# EAGLE board CT_schematic (EAGLE 7.6.0)

Size 100 x 80 mm. Coordinates in mm from the lower left corner, seen from the top.
Outline: 0,0 100,0 100,80 0,80 0,0
Copper layers (1*16): Top 0.035mm / dielectric 1.5mm / Bottom 0.035mm
Design rules "default": minimum track width 10mil, minimum drill 24mil, track to track 8mil, track to pad 8mil, pad to pad 8mil, via to via 8mil, smd to smd 8mil, copper to edge 40mil, drill to drill 8mil, minimum pad ring 10mil, minimum via ring 8mil, stop-mask expansion 4mil, vias tented up to drill 0mil, thermal gap 10mil

## Footprints (pad centres in the part's own frame; a part is rotated, then mirrored left to right if it is on the bottom)
C0603 = smd 0.8 x 0.8: 1 -0.762,0; 2 0.762,0
C0402 = smd 0.5 x 0.5: 1 -0.508,0; 2 0.508,0
C0805 = smd 1.2 x 1.3: 1 -1.016,0; 2 1.016,0
C1210 = smd 1.2 x 2.5: 1 -1.524,0; 2 1.524,0
C1206 = smd 1.3 x 1.6: 1 -1.524,0; 2 1.524,0
EXV-9H = smd 3.505 x 1.676: 1 -2.857,0; 2 2.857,0
L0603 = smd 0.8 x 0.8: 1 -0.762,0; 2 0.762,0
DR1040 = smd 1.6 x 3.2: 1 -4.458,0; 2 4.458,0
PJ-037B_PACKAGE = drill 3.7 square: 1 12,0 | drill 3.2 square: 2 6,0
R0603 = smd 0.8 x 0.8: 1 -0.762,0; 2 0.762,0
UFBGA176_25 = smd 0.3 x 0.3: A1 -4.55,4.55; A2 -3.9,4.55; A3 -3.25,4.55; A4 -2.6,4.55; A5 -1.95,4.55; A6 -1.3,4.55; A7 -0.65,4.55; A8 0,4.55; A9 0.65,4.55; A10 1.3,4.55; A11 1.95,4.55; A12 2.6,4.55; A13 3.25,4.55; A14 3.9,4.55; A15 4.55,4.55; B1 -4.55,3.9; B2 -3.9,3.9; B3 -3.25,3.9; B4 -2.6,3.9; B5 -1.95,3.9; B6 -1.3,3.9; B7 -0.65,3.9; B8 0,3.9; B9 0.65,3.9; B10 1.3,3.9; B11 1.95,3.9; B12 2.6,3.9; B13 3.25,3.9; B14 3.9,3.9; B15 4.55,3.9; C1 -4.55,3.25; C2 -3.9,3.25; C3 -3.25,3.25; C4 -2.6,3.25; C5 -1.95,3.25; C6 -1.3,3.25; C7 -0.65,3.25; C8 0,3.25; C9 0.65,3.25; C10 1.3,3.25; C11 1.95,3.25; C12 2.6,3.25; C13 3.25,3.25; C14 3.9,3.25; C15 4.55,3.25; D1 -4.55,2.6; D2 -3.9,2.6; D3 -3.25,2.6; D4 -2.6,2.6; D5 -1.95,2.6; D6 -1.3,2.6; D7 -0.65,2.6; D8 0,2.6; D9 0.65,2.6; D10 1.3,2.6; D11 1.95,2.6; D12 2.6,2.6; D13 3.25,2.6; D14 3.9,2.6; D15 4.55,2.6; E1 -4.55,1.95; E2 -3.9,1.95; E3 -3.25,1.95; E4 -2.6,1.95; E12 2.6,1.95; E13 3.25,1.95; E14 3.9,1.95; E15 4.55,1.95; F1 -4.55,1.3; F2 -3.9,1.3; F3 -3.25,1.3; F4 -2.6,1.3; F6 -1.3,1.3; F7 -0.65,1.3; F8 0,1.3; F9 0.65,1.3; F10 1.3,1.3; F12 2.6,1.3; F13 3.25,1.3; F14 3.9,1.3; F15 4.55,1.3; G1 -4.55,0.65; G2 -3.9,0.65; G3 -3.25,0.65; G4 -2.6,0.65; G6 -1.3,0.65; G7 -0.65,0.65; G8 0,0.65; G9 0.65,0.65; G10 1.3,0.65; G12 2.6,0.65; G13 3.25,0.65; G14 3.9,0.65; G15 4.55,0.65; H1 -4.55,0; H2 -3.9,0; H3 -3.25,0; H4 -2.6,0; H6 -1.3,0; H7 -0.65,0; H8 0,0; H9 0.65,0; H10 1.3,0; H12 2.6,0; H13 3.25,0; H14 3.9,0; H15 4.55,0; J1 -4.55,-0.65; J2 -3.9,-0.65; J3 -3.25,-0.65; J4 -2.6,-0.65; J6 -1.3,-0.65; J7 -0.65,-0.65; J8 0,-0.65; J9 0.65,-0.65; J10 1.3,-0.65; J12 2.6,-0.65; J13 3.25,-0.65; J14 3.9,-0.65; J15 4.55,-0.65; K1 -4.55,-1.3; K2 -3.9,-1.3; K3 -3.25,-1.3; K4 -2.6,-1.3; K6 -1.3,-1.3; K7 -0.65,-1.3; K8 0,-1.3; K9 0.65,-1.3; K10 1.3,-1.3; K12 2.6,-1.3; K13 3.25,-1.3; K14 3.9,-1.3; K15 4.55,-1.3; L1 -4.55,-1.95; L2 -3.9,-1.95; L3 -3.25,-1.95; L4 -2.6,-1.95; L12 2.6,-1.95; L13 3.25,-1.95; L14 3.9,-1.95; L15 4.55,-1.95; M1 -4.55,-2.6; M2 -3.9,-2.6; M3 -3.25,-2.6; M4 -2.6,-2.6; M5 -1.95,-2.6; M6 -1.3,-2.6; M7 -0.65,-2.6; M8 0,-2.6; M9 0.65,-2.6; M10 1.3,-2.6; M11 1.95,-2.6; M12 2.6,-2.6; M13 3.25,-2.6; M14 3.9,-2.6; M15 4.55,-2.6; N1 -4.55,-3.25; N2 -3.9,-3.25; N3 -3.25,-3.25; N4 -2.6,-3.25; N5 -1.95,-3.25; N6 -1.3,-3.25; N7 -0.65,-3.25; N8 0,-3.25; N9 0.65,-3.25; N10 1.3,-3.25; N11 1.95,-3.25; N12 2.6,-3.25; N13 3.25,-3.25; N14 3.9,-3.25; N15 4.55,-3.25; P1 -4.55,-3.9; P2 -3.9,-3.9; P3 -3.25,-3.9; P4 -2.6,-3.9; P5 -1.95,-3.9; P6 -1.3,-3.9; P7 -0.65,-3.9; P8 0,-3.9; P9 0.65,-3.9; P10 1.3,-3.9; P11 1.95,-3.9; P12 2.6,-3.9; P13 3.25,-3.9; P14 3.9,-3.9; P15 4.55,-3.9; R1 -4.55,-4.55; R2 -3.9,-4.55; R3 -3.25,-4.55; R4 -2.6,-4.55; R5 -1.95,-4.55; R6 -1.3,-4.55; R7 -0.65,-4.55; R8 0,-4.55; R9 0.65,-4.55; R10 1.3,-4.55; R11 1.95,-4.55; R12 2.6,-4.55; R13 3.25,-4.55; R14 3.9,-4.55; R15 4.55,-4.55
TQFP64_10X10MC = smd 1.473 x 0.279: 1 -5.613,3.75; 2 -5.613,3.25; 3 -5.613,2.75; 4 -5.613,2.25; 5 -5.613,1.75; 6 -5.613,1.25; 7 -5.613,0.75; 8 -5.613,0.25; 9 -5.613,-0.25; 10 -5.613,-0.75; 11 -5.613,-1.25; 12 -5.613,-1.75; 13 -5.613,-2.25; 14 -5.613,-2.75; 15 -5.613,-3.25; 16 -5.613,-3.75; 33 5.613,-3.75; 34 5.613,-3.25; 35 5.613,-2.75; 36 5.613,-2.25; 37 5.613,-1.75; 38 5.613,-1.25; 39 5.613,-0.75; 40 5.613,-0.25; 41 5.613,0.25; 42 5.613,0.75; 43 5.613,1.25; 44 5.613,1.75; 45 5.613,2.25; 46 5.613,2.75; 47 5.613,3.25; 48 5.613,3.75 | smd 0.279 x 1.473: 17 -3.75,-5.613; 18 -3.25,-5.613; 19 -2.75,-5.613; 20 -2.25,-5.613; 21 -1.75,-5.613; 22 -1.25,-5.613; 23 -0.75,-5.613; 24 -0.25,-5.613; 25 0.25,-5.613; 26 0.75,-5.613; 27 1.25,-5.613; 28 1.75,-5.613; 29 2.25,-5.613; 30 2.75,-5.613; 31 3.25,-5.613; 32 3.75,-5.613; 49 3.75,5.613; 50 3.25,5.613; 51 2.75,5.613; 52 2.25,5.613; 53 1.75,5.613; 54 1.25,5.613; 55 0.75,5.613; 56 0.25,5.613; 57 -0.25,5.613; 58 -0.75,5.613; 59 -1.25,5.613; 60 -1.75,5.613; 61 -2.25,5.613; 62 -2.75,5.613; 63 -3.25,5.613; 64 -3.75,5.613
7498011122R = smd 0.71 x 2.29: 1 -3.545,-3.18; 2 -2.525,-3.18; 3 -1.505,-3.18; 4 -0.485,-3.18; 5 0.535,-3.18; 6 1.555,-3.18; 8 3.595,-3.18; 9 5.635,-3.18; 10 6.655,-3.18; 11 -6.605,-3.18; 12 -5.585,-3.18 | smd 1.4 x 2.54: 13 -8.51,10.2; 14 8.51,10.2 | hole 1.4: -3.5,0; 3.5,0
SSOP-28 = smd 1.5 x 0.4: 1 -3.625,4.225; 2 -3.625,3.575; 3 -3.625,2.925; 4 -3.625,2.275; 5 -3.625,1.625; 6 -3.625,0.975; 7 -3.625,0.325; 8 -3.625,-0.325; 9 -3.625,-0.975; 10 -3.625,-1.625; 11 -3.625,-2.275; 12 -3.625,-2.925; 13 -3.625,-3.575; 14 -3.625,-4.225; 15 3.625,-4.225; 16 3.625,-3.575; 17 3.625,-2.925; 18 3.625,-2.275; 19 3.625,-1.625; 20 3.625,-0.975; 21 3.625,-0.325; 22 3.625,0.325; 23 3.625,0.975; 24 3.625,1.625; 25 3.625,2.275; 26 3.625,2.925; 27 3.625,3.575; 28 3.625,4.225
FCI_10118193-0001LF = smd 0.4 x 1.35: 1 -1.3,2.675; 2 -0.65,2.675; 3 0,2.675; 4 0.65,2.675; 5 1.3,2.675 | smd 1.6 x 1.4: 6 -3.2,2.45; 7 3.2,2.45 | smd 1.9 x 1.9: 8 -1.2,0; 9 1.2,0 | hole 0.5: -3.3,0; 3.3,0
TST-110-05-T-D-RA = drill 1 pad 1.7 square: 1 0,0 | drill 1 pad 1.7: 2 0,2.54; 3 2.54,0; 4 2.54,2.54; 5 5.08,0; 6 5.08,2.54; 7 7.62,0; 8 7.62,2.54; 9 10.16,0; 10 10.16,2.54; 11 12.7,0; 12 12.7,2.54; 13 15.24,0; 14 15.24,2.54; 15 17.78,0; 16 17.78,2.54; 17 20.32,0; 18 20.32,2.54; 19 22.86,0; 20 22.86,2.54
TDFN-8/6MM = smd 0.3 x 0.75: 1 0,0; 2 0.5,0; 3 1,0; 4 1.5,0; 5 1.5,3; 6 1,3; 7 0.5,3; 8 0,3
QFN-28 = smd 0.813 x 0.305: 1 -2.451,1.5; 2 -2.451,1; 3 -2.451,0.5; 4 -2.451,0; 5 -2.451,-0.5; 6 -2.451,-1; 7 -2.451,-1.5; 15 2.451,-1.5; 16 2.451,-1; 17 2.451,-0.5; 18 2.451,0; 19 2.451,0.5; 20 2.451,1; 21 2.451,1.5 | smd 0.305 x 0.813: 8 -1.5,-2.451; 9 -1,-2.451; 10 -0.5,-2.451; 11 0,-2.451; 12 0.5,-2.451; 13 1,-2.451; 14 1.5,-2.451; 22 1.5,2.451; 23 1,2.451; 24 0.5,2.451; 25 0,2.451; 26 -0.5,2.451; 27 -1,2.451; 28 -1.5,2.451 | smd 3.607 x 3.607: 29 0,0
SJ-43515TS-SMT-TR = smd 2.2 x 3: 1 0.6,-7.4; 4 3.4,-7.4 | smd 3 x 3: 2 12.8,-7.4; 5 17,-3 | smd 2 x 3: 3 5.3,0; 6 2.5,0 | drill 1.8: P$7 4.5,-3.69; P$8 11.54,-3.69
ABS07-32.768KHZ-7-T = smd 1.1 x 2.4: 1 -2.5,0; 2 0,0
ABLS-12.000MHZ-B4-T = smd 5.6 x 2.8: 1 0,0; 2 9.5,0
ABLS-12.288MHZ-B4-T = smd 5.6 x 2.8: 1 -3.81,0; 2 5.69,0
ASFL1 = smd 1.7 x 1.5: 1 -1.27,-1.1; 2 1.27,-1.1; 3 1.27,1.1; 4 -1.27,1.1
IDT74FCT38072 = smd 0.51 x 1: 1 0,0; 2 1.27,0; 3 2.54,0; 4 3.81,0; 5 3.81,4.95; 6 2.54,4.95; 7 1.27,4.95; 8 0,4.95
HTSSOP14 = smd 1.676 x 0.356: 1 -2.8,1.95; 2 -2.8,1.3; 3 -2.8,0.65; 4 -2.8,0; 5 -2.8,-0.65; 6 -2.8,-1.3; 7 -2.8,-1.95; 8 2.8,-1.95; 9 2.8,-1.3; 10 2.8,-0.65; 11 2.8,0; 12 2.8,0.65; 13 2.8,1.3; 14 2.8,1.95 | smd 3 x 5: 15 0,0 | drill 0.4 pad 0.45: P$1 -0.75,1.5; P$2 0.75,1.5; P$3 -0.75,0; P$4 0.8,0; P$5 -0.75,-1.5; P$6 0.9,-1.5
SON-6 = smd 0.55 x 0.3: 1 -0.355,0.5 | smd 0.52 x 0.3: 2 -0.37,0; 3 -0.37,-0.5; 4 0.37,-0.5; 5 0.37,0; 6 0.37,0.5
SW_4-1437565-2 = smd 1.4 x 2.1: 1 -2.23,4.55; 2 -2.23,-4.55; 3 2.23,4.55; 4 2.23,-4.55
LGM67K-G1J2-24-Z = smd 0.8 x 1.4: A -2,0; C 0,0
NC7SZ125M5X = smd 1.3 x 0.7: 1 -1.3,0.95; 2 -1.3,0; 3 -1.3,-0.95; 4 1.3,-0.95; 5 1.3,0.95

## Placement (x,y rotation side)
C1  1e-06  [C0603]  -38.1,92.71 0 top  (outside the outline)
C2  1e-07  [C0603]  -41.91,92.71 0 top  (outside the outline)
C3  1e-07  [C0603]  -45.72,92.71 0 top  (outside the outline)
C4  1e-07  [C0603]  -49.53,92.71 0 top  (outside the outline)
C5  1e-07  [C0603]  -53.34,92.71 0 top  (outside the outline)
C6  1e-07  [C0603]  -57.15,92.71 0 top  (outside the outline)
C7  1e-07  [C0603]  -60.96,92.71 0 top  (outside the outline)
C8  1e-07  [C0603]  -64.77,92.71 0 top  (outside the outline)
C9  1e-07  [C0603]  -68.58,92.71 0 top  (outside the outline)
C10  1e-07  [C0603]  -72.39,92.71 0 top  (outside the outline)
C11  1e-07  [C0603]  -76.2,92.71 0 top  (outside the outline)
C12  1e-07  [C0603]  -80.01,92.71 0 top  (outside the outline)
C13  1e-07  [C0603]  -83.82,92.71 0 top  (outside the outline)
C14  1e-07  [C0603]  -87.63,92.71 0 top  (outside the outline)
C15  1e-07  [C0603]  -91.44,92.71 0 top  (outside the outline)
C16  1e-07  [C0603]  -15.24,97.79 0 top  (outside the outline)
C17  4.7e-06  [C0603]  -19.05,92.71 0 top  (outside the outline)
C18  1e-07  [C0603]  -19.05,97.79 0 top  (outside the outline)
C19  1e-08  [C0603]  -22.86,97.79 0 top  (outside the outline)
C20  1e-06  [C0603]  -26.67,97.79 0 top  (outside the outline)
C21  1e-07  [C0603]  -30.48,97.79 0 top  (outside the outline)
C22  2.2e-06  [C0603]  -22.86,92.71 0 top  (outside the outline)
C23  2.2e-06  [C0603]  -26.67,92.71 0 top  (outside the outline)
C24  1e-11  [C0402]  -39.37,102.87 0 top  (outside the outline)
C25  1e-11  [C0402]  -43.18,102.87 0 top  (outside the outline)
C26  1.8e-08  [C0402]  -24.13,102.87 0 top  (outside the outline)
C27  2.2e-06  [C0603]  -30.48,92.71 0 top  (outside the outline)
C28  1e-07  [C0402]  -46.99,102.87 0 top  (outside the outline)
C29  1e-08  [C0402]  -50.8,102.87 0 top  (outside the outline)
C30  2.2e-06  [C0603]  -34.29,92.71 0 top  (outside the outline)
C31  1e-07  [C0402]  -54.61,102.87 0 top  (outside the outline)
C32  1e-08  [C0402]  -58.42,102.87 0 top  (outside the outline)
C33  1e-07  [C0402]  -62.23,102.87 0 top  (outside the outline)
C34  1e-07  [C0402]  -66.04,102.87 0 top  (outside the outline)
C35  1e-05  [C0805]  -80.01,74.93 0 top  (outside the outline)
C36  1e-07  [C0402]  -69.85,102.87 0 top  (outside the outline)
C37  1e-07  [C0402]  -73.66,102.87 0 top  (outside the outline)
C38  1e-07  [C0402]  -77.47,102.87 0 top  (outside the outline)
C39  4.7e-06  [C0805]  -85.09,74.93 0 top  (outside the outline)
C40  1e-07  [C0402]  -81.28,102.87 0 top  (outside the outline)
C41  1e-07  [C0402]  -85.09,102.87 0 top  (outside the outline)
C42  1e-07  [C0402]  -88.9,102.87 0 top  (outside the outline)
C43  1e-08  [C0402]  -92.71,102.87 0 top  (outside the outline)
C44  2.2e-05  [C1210]  -24.13,74.93 0 top  (outside the outline)
C45  2.2e-05  [C1210]  -30.48,74.93 0 top  (outside the outline)
C46  1e-09  [C0402]  -15.24,107.95 0 top  (outside the outline)
C47  1e-09  [C0402]  -19.05,107.95 0 top  (outside the outline)
C48  1e-07  [C0402]  -22.86,107.95 0 top  (outside the outline)
C49  1e-07  [C0402]  -26.67,107.95 0 top  (outside the outline)
C50  1e-07  [C0402]  -30.48,107.95 0 top  (outside the outline)
C51  1e-07  [C0402]  -34.29,107.95 0 top  (outside the outline)
C52  1e-07  [C0402]  -38.1,107.95 0 top  (outside the outline)
C53  1e-05  [C0805]  -90.17,74.93 0 top  (outside the outline)
C54  1e-05  [C0805]  -15.24,82.55 0 top  (outside the outline)
C55  1e-05  [C0805]  -20.32,82.55 0 top  (outside the outline)
C56  1e-05  [C0805]  -25.4,82.55 0 top  (outside the outline)
C57  1e-05  [C0805]  -30.48,82.55 0 top  (outside the outline)
C58  2.2e-11  [C0402]  -27.94,102.87 0 top  (outside the outline)
C59  2.2e-11  [C0402]  -31.75,102.87 0 top  (outside the outline)
C60  1e-08  [C0402]  -41.91,107.95 0 top  (outside the outline)
C61  1e-08  [C0402]  -45.72,107.95 0 top  (outside the outline)
C62  1e-06  [C0603]  -34.29,97.79 0 top  (outside the outline)
C63  3.3e-09  [C0402]  -35.56,102.87 0 top  (outside the outline)
C64  1e-07  [C0402]  -49.53,107.95 0 top  (outside the outline)
C65  2.2e-05  [C1210]  -36.83,74.93 0 top  (outside the outline)
C66  2.2e-05  [C1210]  -43.18,74.93 0 top  (outside the outline)
C67  1e-05  [C1206]  -49.53,74.93 0 top  (outside the outline)
C68  1e-05  [C1206]  -55.88,74.93 0 top  (outside the outline)
C69  1e-07  [C0402]  -53.34,107.95 0 top  (outside the outline)
C70  0.0001  [EXV-9H]  -72.39,59.69 0 top  (outside the outline)
C71  0.0001  [EXV-9H]  -83.82,59.69 0 top  (outside the outline)
C72  1e-08  [C0402]  -57.15,107.95 0 top  (outside the outline)
C73  1e-08  [C0402]  -60.96,107.95 0 top  (outside the outline)
C74  1e-08  [C0402]  -64.77,107.95 0 top  (outside the outline)
F1  240.0  [L0603]  -38.1,97.79 0 top  (outside the outline)
F2  510.0  [L0603]  -41.91,97.79 0 top  (outside the outline)
I1  5.2e-06  [DR1040]  -38.1,48.26 0 top  (outside the outline)
J1  PJ-037B  [PJ-037B_PACKAGE]  -83.82,35.56 0 top  (outside the outline)
R2  1000.0  [R0603]  -45.72,97.79 0 top  (outside the outline)
R7  4700.0  [R0603]  -49.53,97.79 0 top  (outside the outline)
R8  4700.0  [R0603]  -53.34,97.79 0 top  (outside the outline)
R9  2200.0  [R0603]  -57.15,97.79 0 top  (outside the outline)
R11  2200.0  [R0603]  -60.96,97.79 0 top  (outside the outline)
R13  2200.0  [R0603]  -64.77,97.79 0 top  (outside the outline)
R15  2200.0  [R0603]  -68.58,97.79 0 top  (outside the outline)
R17  10000.0  [R0603]  -54.61,81.28 0 top  (outside the outline)
R18  10000.0  [R0603]  -59.69,81.28 0 top  (outside the outline)
R19  10000.0  [R0603]  -64.77,81.28 0 top  (outside the outline)
R20  0.1  [R0603]  -72.39,97.79 0 top  (outside the outline)
R21  0.1  [R0603]  -76.2,97.79 0 top  (outside the outline)
R22  200.0  [R0603]  -80.01,97.79 0 top  (outside the outline)
R23  200.0  [R0603]  -83.82,97.79 0 top  (outside the outline)
R24  10000.0  [R0603]  -69.85,81.28 0 top  (outside the outline)
R25  10000.0  [R0603]  -74.93,81.28 0 top  (outside the outline)
R26  10000.0  [R0603]  -80.01,81.28 0 top  (outside the outline)
R27  1270.0  [R0603]  -87.63,97.79 0 top  (outside the outline)
R28  10000.0  [R0603]  -85.09,81.28 0 top  (outside the outline)
R29  10000.0  [R0603]  -90.17,81.28 0 top  (outside the outline)
R30  10000.0  [R0603]  -15.24,87.63 0 top  (outside the outline)
R31  10000.0  [R0603]  -20.32,87.63 0 top  (outside the outline)
R32  10000.0  [R0603]  -25.4,87.63 0 top  (outside the outline)
R33  10000.0  [R0603]  -30.48,87.63 0 top  (outside the outline)
R34  10000.0  [R0603]  -35.56,87.63 0 top  (outside the outline)
R35  4700.0  [R0603]  -91.44,97.79 0 top  (outside the outline)
R36  10000.0  [R0603]  -40.64,87.63 0 top  (outside the outline)
R37  10000.0  [R0603]  -45.72,87.63 0 top  (outside the outline)
R38  10000.0  [R0603]  -50.8,87.63 0 top  (outside the outline)
R39  10000.0  [R0603]  -55.88,87.63 0 top  (outside the outline)
R40  10000.0  [R0603]  -60.96,87.63 0 top  (outside the outline)
R41  10000.0  [R0603]  -66.04,87.63 0 top  (outside the outline)
R42  47000.0  [R0603]  -71.12,87.63 0 top  (outside the outline)
R43  47000.0  [R0603]  -76.2,87.63 0 top  (outside the outline)
R44  47000.0  [R0603]  -81.28,87.63 0 top  (outside the outline)
R45  680.0  [R0603]  -15.24,102.87 0 top  (outside the outline)
R46  71007.101651032  [R0603]  -39.37,81.28 0 top  (outside the outline)
R47  22000.0  [R0603]  -86.36,87.63 0 top  (outside the outline)
R48  10000.0  [R0603]  -91.44,87.63 0 top  (outside the outline)
R49  10000.0  [R0603]  -15.24,92.71 0 top  (outside the outline)
R50  9100.0  [R0603]  -19.05,102.87 0 top  (outside the outline)
R51  680000.0  [R0603]  -44.45,81.28 0 top  (outside the outline)
R52  120000.0  [R0603]  -49.53,81.28 0 top  (outside the outline)
U1  STM32F767IIK6  [UFBGA176_25]  -52.07,6.35 0 top  (outside the outline)
U2  BCM5221KPT  [TQFP64_10X10MC]  -67.31,7.62 0 top  (outside the outline)
U3  7498011122R  [7498011122R]  -22.86,7.62 0 top  (outside the outline)
U4  FT232RL-REEL  [SSOP-28]  -40.64,7.62 0 top  (outside the outline)
U5  10118193-0001LF  [FCI_10118193-0001LF]  -80.01,46.99 0 top  (outside the outline)
U6  TST-110-05-T-D-RA  [TST-110-05-T-D-RA]  -64.77,57.15 0 top  (outside the outline)
U7  24AA64T-I/MNY  [TDFN-8/6MM]  -54.61,46.99 0 top  (outside the outline)
U8  WM8731CLSEFL  [QFN-28]  -16.51,76.2 0 top  (outside the outline)
U9  SJ-43515TS-SMT-TR  [SJ-43515TS-SMT-TR]  -39.37,38.1 0 top  (outside the outline)
U10  SJ-43515TS-SMT-TR  [SJ-43515TS-SMT-TR]  -67.31,38.1 0 top  (outside the outline)
U11  ABS07-32.768KHZ-7-T  [ABS07-32.768KHZ-7-T]  -68.58,68.58 0 top  (outside the outline)
U12  ABLS-12.000MHZ-B4-T  [ABLS-12.000MHZ-B4-T]  -29.21,68.58 0 top  (outside the outline)
U13  ABLS-12.288MHZ-B4-T  [ABLS-12.288MHZ-B4-T]  -45.72,68.58 0 top  (outside the outline)
U14  ASFL1-25MHZ-NCS  [ASFL1]  -71.12,48.26 0 top  (outside the outline)
U15  idt74fct38072  [IDT74FCT38072]  -29.21,57.15 0 top  (outside the outline)
U16  tps54225PWP  [HTSSOP14]  -77.47,67.31 0 top  (outside the outline)
U17  TPS3895ADRYR  [SON-6]  -67.31,106.68 0 top  (outside the outline)
U18  4-1437565-2  [SW_4-1437565-2]  -27.94,49.53 0 top  (outside the outline)
U19  Q65110A2395  [LGM67K-G1J2-24-Z]  -86.36,67.31 0 top  (outside the outline)
U20  nc7sz125m5x  [NC7SZ125M5X]  -60.96,74.93 0 top  (outside the outline)
U21  nc7sz125m5x  [NC7SZ125M5X]  -67.31,74.93 0 top  (outside the outline)
U22  nc7sz125m5x  [NC7SZ125M5X]  -73.66,74.93 0 top  (outside the outline)

## Library data of the parts
C1-C74 F1 F2 I1 J1 R2 R7-R9 R11 R13 R15 R17-R52 U1-U22 = circuit_tree

## Nets
CLK_CRYSTAL_U1_E1: C24.1 U1.E1 U11.1
CLK_CRYSTAL_U1_F1: C25.1 U1.F1 U11.2
CLK_CRYSTAL_U4_27: U4.27 U12.1
CLK_CRYSTAL_U4_28: U4.28 U12.2
CLK_CRYSTAL_U8_1: C58.1 U8.1 U13.1
CLK_CRYSTAL_U8_2: C59.1 U8.2 U13.2
CLK_U1_G1: U1.G1 U15.7
CLK_U2_4: U2.4 U15.6
CLK_U15_3: U14.3 U15.3
GND: C1.2 C2.2 C3.2 C4.2 C5.2 C6.2 C7.2 C8.2 C9.2 C10.2 C11.2 C12.2 C13.2 C14.2 C15.2 C16.2 C17.2 C18.2 C19.2 C20.2 C21.2 C22.2 C23.2 C24.2 C25.2 C26.2 C27.2 C28.2 C29.2 C30.2 C31.2 C32.2 C33.2 C34.2 C35.2 C36.2 C37.2 C38.2 C39.2 C40.2 C41.2 C42.2 C43.2 C47.2 C48.2 C49.2 C50.2 C51.2 C52.2 C53.2 C54.2 C55.2 C56.2 C57.2 C58.2 C59.2 C60.2 C61.2 C62.2 C63.2 C65.2 C66.2 C67.2 C68.2 C69.2 C70.2 C71.2 C72.2 C73.2 C74.2 J1.2 R2.2 R17.2 R19.2 R20.2 R21.2 R24.2 R26.2 R27.2 R30.2 R31.2 R32.2 R37.2 R42.2 R43.2 R44.2 R47.2 R50.2 R52.2 U1.D5 U1.D7 U1.D8 U1.D9 U1.F2 U1.F6 U1.F7 U1.F8 U1.F9 U1.F10 U1.F12 U1.G2 U1.G6 U1.G7 U1.G8 U1.G9 U1.G10 U1.G12 U1.H6 U1.H7 U1.H8 U1.H9 U1.H10 U1.H12 U1.J6 U1.J7 U1.J8 U1.J9 U1.J10 U1.K6 U1.K7 U1.K8 U1.K9 U1.K10 U1.M1 U1.M8 U1.M9 U1.N1 U2.6 U2.7 U2.24 U2.29 U2.32 U2.40 U2.45 U2.54 U2.63 U3.10 U3.12 U4.7 U4.18 U4.21 U4.25 U4.26 U5.5 U5.6 U5.7 U5.8 U5.9 U6.4 U6.6 U6.8 U6.10 U6.12 U6.14 U6.16 U6.18 U6.20 U7.4 U8.4 U8.15 U8.19 U8.25 U8.26 U8.29 U9.1 U10.1 U14.2 U15.4 U15.5 U15.8 U16.5 U16.8 U16.9 U16.15 U17.2 U19.C U20.2 U20.3 U21.1 U21.3 U22.1 U22.3
NET_U1_A5: R9.1 U1.A5 U7.6
NET_U1_B4: R11.1 U1.B4 U7.5
NET_U1_C6: R18.1 U1.C6
NET_U1_D6: R17.1 U1.D6
NET_U1_F13: C23.1 U1.F13
NET_U1_J1: R8.1 U1.J1 U22.4
NET_U1_L4: R19.1 U1.L4
NET_U1_M3: R13.1 U1.M3 U2.42
NET_U1_M10: C22.1 U1.M10
NET_U1_P2: R15.1 U1.P2 U2.41
NET_U1_R1: C19.1 C20.1 F1.1 U1.P1 U1.R1
NET_U1_R14: U19.A
NET_U1_R15: U18.3 U18.4
NET_U2_2: C30.1 C31.1 C32.1 U2.2 U2.55
NET_U2_9: R7.1 U2.9 U21.4
NET_U2_10: R28.1 U2.10
NET_U2_11: R29.1 U2.11
NET_U2_12: R30.1 U2.12
NET_U2_13: R31.1 U2.13
NET_U2_14: R32.1 U2.14
NET_U2_16: R26.1 U2.16
NET_U2_18: R34.1 U2.18
NET_U2_20: U2.20
NET_U2_23: R27.1 U2.23
NET_U2_27: C27.1 C28.1 C29.1 U2.22 U2.27 U2.28
NET_U2_37: R33.1 U2.37
NET_U2_38: R24.1 U2.38
NET_U2_39: R25.1 U2.39
NET_U3_1: U2.31 U3.1
NET_U3_2: F2.2 U3.2
NET_U3_3: U2.30 U3.3
NET_U3_4: U2.26 U3.4
NET_U3_5: C26.1 F2.1 U3.2 U3.5
NET_U3_6: U2.25 U3.6
NET_U3_8: R21.1 U3.8
NET_U3_9: R22.1 U3.9
NET_U3_11: R23.1 U3.11
NET_U3_12: R22.2 U3.12
NET_U3_13: R20.1 U3.13 U3.14
NET_U3_35: R23.2
NET_U4_14: R36.1 U4.14
NET_U4_17: C40.1 U4.17
NET_U4_19: R37.1 U4.19
NET_U5_1: R35.1 U5.1
NET_U5_2: U4.16 U5.2
NET_U5_3: U4.15 U5.3
NET_U5_19: R35.2
NET_U7_1: R39.1 U7.1
NET_U7_2: R40.1 U7.2
NET_U7_3: R41.1 U7.3
NET_U8_9: U8.9
NET_U8_20: C52.1 C57.1 U8.20
NET_U9_2: C45.1 R43.1 U9.2
NET_U9_5: C44.1 R42.1 U9.5
NET_U9_13: C44.2
NET_U9_14: C45.2
NET_U10_5: C46.1 C47.1 R44.1 R45.1 U10.5
NET_U10_21: R45.2
NET_U10_22: C46.2
NET_U16_2: R46.2 R47.1 U16.2
NET_U16_3: C62.1 U16.3
NET_U16_4: C63.1 U16.4
NET_U16_10: C64.1 I1.1 U16.10 U16.11
NET_U16_12: C64.2 U16.12
NET_U17_1: R49.1 R50.1 U17.1
NET_U17_3: R51.2 R52.1 U17.3
NET_U17_4: R48.1 U17.4 U20.4 U21.2 U22.2
NET_U18_1: R2.1 U18.1 U18.2
PROC_ETH_COL: U1.G4 U2.61
PROC_ETH_CRS: U1.F4 U2.62
PROC_ETH_RX_CLK: U1.N2 U2.50
PROC_ETH_RX_DV: U1.R3 U2.49
PROC_ETH_RX_ER: U1.E3 U2.51
PROC_ETH_RXD0: U1.N5 U2.48
PROC_ETH_RXD1: U1.P5 U2.47
PROC_ETH_RXD2: U1.M11 U2.44
PROC_ETH_RXD3: U1.N12 U2.43
PROC_ETH_TX_CLK: U1.M5 U2.53
PROC_ETH_TX_EN: U1.R13 U2.56
PROC_ETH_TXD0: U1.A8 U2.57
PROC_ETH_TXD1: U1.A7 U2.58
PROC_ETH_TXD2: U1.M4 U2.59
PROC_ETH_TXD3: U1.A2 U2.60
PROC_I2S1_CK: U1.B9 U8.7
PROC_I2S1_SD: U1.A6 U8.8
PROC_I2S1_WS: U1.B10 U8.9 U8.11
PROC_SYS_JTCK_SWCLK: U1.A14 U6.9
PROC_SYS_JTDO_SWO: U1.A10 U6.13
PROC_SYS_JTMS_SWDIO: U1.A15 U6.7
PROC_UART4_CTS: U1.R5 U4.3
PROC_UART4_RTS: U1.A13 U4.11
PROC_UART4_RX: U1.B12 U4.1
PROC_UART4_TX: U1.B14 U4.5
RST_OUT_U6_SRESET_B: R38.1 U6.15 U20.1
VCC_S1_7V4: C67.1 C68.1 C70.1 C71.1 J1.1 U16.7 U16.13 U16.14
VCC_TIER1_3V3: C1.1 C2.1 C3.1 C4.1 C5.1 C6.1 C7.1 C8.1 C9.1 C10.1 C11.1 C12.1 C13.1 C14.1 C15.1 C16.1 C17.1 C18.1 C21.1 C33.1 C34.1 C35.1 C36.1 C37.1 C38.1 C39.1 C41.1 C42.1 C43.1 C48.1 C49.1 C50.1 C51.1 C53.1 C54.1 C55.1 C56.1 C60.1 C61.1 C65.1 C66.1 C69.1 C72.1 C73.1 C74.1 F1.2 I1.2 R7.2 R8.2 R9.2 R11.2 R13.2 R15.2 R18.2 R25.2 R28.2 R29.2 R33.2 R34.2 R36.2 R38.2 R39.2 R40.2 R41.2 R46.1 R48.2 R49.2 R51.1 U1.C1 U1.C5 U1.C7 U1.C8 U1.C9 U1.F3 U1.G3 U1.G13 U1.H13 U1.J12 U1.J13 U1.K4 U1.N8 U1.N9 U1.N10 U2.1 U2.3 U2.46 U4.4 U4.20 U6.1 U7.7 U7.8 U8.3 U8.5 U8.12 U8.18 U14.4 U15.1 U15.2 U16.1 U17.6 U20.5 U21.5 U22.5

## Tracks (layer width: path | path; a pad name or v marks a point on that pad's centre or on a via)
CLK_CRYSTAL_U1_E1  (2 unrouted)
CLK_CRYSTAL_U1_F1  (2 unrouted)
CLK_CRYSTAL_U4_27  (1 unrouted)
CLK_CRYSTAL_U4_28  (1 unrouted)
CLK_CRYSTAL_U8_1  (2 unrouted)
CLK_CRYSTAL_U8_2  (2 unrouted)
CLK_U1_G1  (1 unrouted)
CLK_U2_4  (1 unrouted)
CLK_U15_3  (1 unrouted)
GND  (181 unrouted)
NET_U1_A5  (2 unrouted)
NET_U1_B4  (2 unrouted)
NET_U1_C6  (1 unrouted)
NET_U1_D6  (1 unrouted)
NET_U1_F13  (1 unrouted)
NET_U1_J1  (2 unrouted)
NET_U1_L4  (1 unrouted)
NET_U1_M3  (2 unrouted)
NET_U1_M10  (1 unrouted)
NET_U1_P2  (2 unrouted)
NET_U1_R1  (4 unrouted)
NET_U1_R15  (1 unrouted)
NET_U2_2  (4 unrouted)
NET_U2_9  (2 unrouted)
NET_U2_10  (1 unrouted)
NET_U2_11  (1 unrouted)
NET_U2_12  (1 unrouted)
NET_U2_13  (1 unrouted)
NET_U2_14  (1 unrouted)
NET_U2_16  (1 unrouted)
NET_U2_18  (1 unrouted)
NET_U2_23  (1 unrouted)
NET_U2_27  (5 unrouted)
NET_U2_37  (1 unrouted)
NET_U2_38  (1 unrouted)
NET_U2_39  (1 unrouted)
NET_U3_1  (1 unrouted)
NET_U3_2  (1 unrouted)
NET_U3_3  (1 unrouted)
NET_U3_4  (1 unrouted)
NET_U3_5  (3 unrouted)
NET_U3_6  (1 unrouted)
NET_U3_8  (1 unrouted)
NET_U3_9  (1 unrouted)
NET_U3_11  (1 unrouted)
NET_U3_12  (1 unrouted)
NET_U3_13  (2 unrouted)
NET_U4_14  (1 unrouted)
NET_U4_17  (1 unrouted)
NET_U4_19  (1 unrouted)
NET_U5_1  (1 unrouted)
NET_U5_2  (1 unrouted)
NET_U5_3  (1 unrouted)
NET_U7_1  (1 unrouted)
NET_U7_2  (1 unrouted)
NET_U7_3  (1 unrouted)
NET_U8_20  (2 unrouted)
NET_U9_2  (2 unrouted)
NET_U9_5  (2 unrouted)
NET_U10_5  (4 unrouted)
NET_U16_2  (2 unrouted)
NET_U16_3  (1 unrouted)
NET_U16_4  (1 unrouted)
NET_U16_10  (3 unrouted)
NET_U16_12  (1 unrouted)
NET_U17_1  (2 unrouted)
NET_U17_3  (2 unrouted)
NET_U17_4  (4 unrouted)
NET_U18_1  (2 unrouted)
PROC_ETH_COL  (1 unrouted)
PROC_ETH_CRS  (1 unrouted)
PROC_ETH_RX_CLK  (1 unrouted)
PROC_ETH_RX_DV  (1 unrouted)
PROC_ETH_RX_ER  (1 unrouted)
PROC_ETH_RXD0  (1 unrouted)
PROC_ETH_RXD1  (1 unrouted)
PROC_ETH_RXD2  (1 unrouted)
PROC_ETH_RXD3  (1 unrouted)
PROC_ETH_TX_CLK  (1 unrouted)
PROC_ETH_TX_EN  (1 unrouted)
PROC_ETH_TXD0  (1 unrouted)
PROC_ETH_TXD1  (1 unrouted)
PROC_ETH_TXD2  (1 unrouted)
PROC_ETH_TXD3  (1 unrouted)
PROC_I2S1_CK  (1 unrouted)
PROC_I2S1_SD  (1 unrouted)
PROC_I2S1_WS  (2 unrouted)
PROC_SYS_JTCK_SWCLK  (1 unrouted)
PROC_SYS_JTDO_SWO  (1 unrouted)
PROC_SYS_JTMS_SWDIO  (1 unrouted)
PROC_UART4_CTS  (1 unrouted)
PROC_UART4_RTS  (1 unrouted)
PROC_UART4_RX  (1 unrouted)
PROC_UART4_TX  (1 unrouted)
RST_OUT_U6_SRESET_B  (2 unrouted)
VCC_S1_7V4  (7 unrouted)
VCC_TIER1_3V3  (102 unrouted)